# EAGLE board Extension (EAGLE 7.2.0)
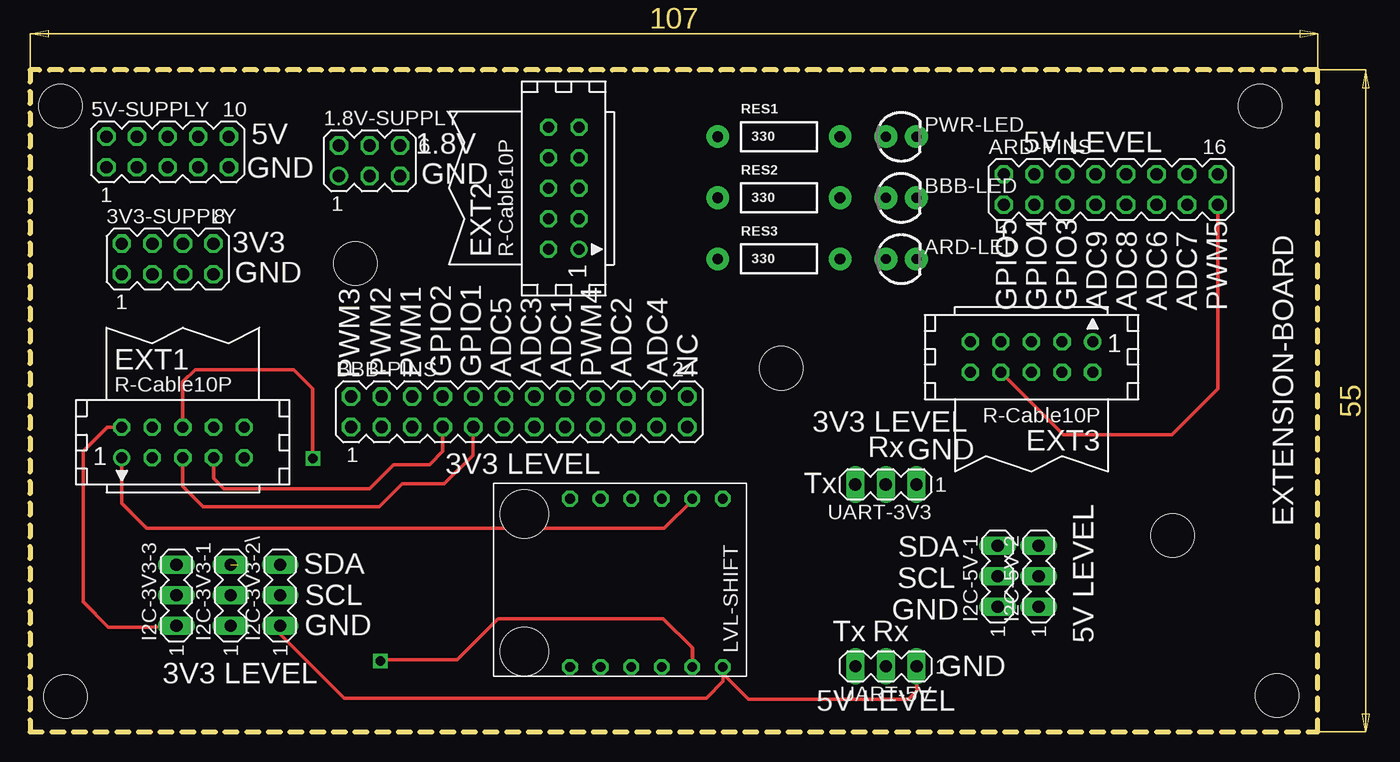
[diagram p0: board, top side]
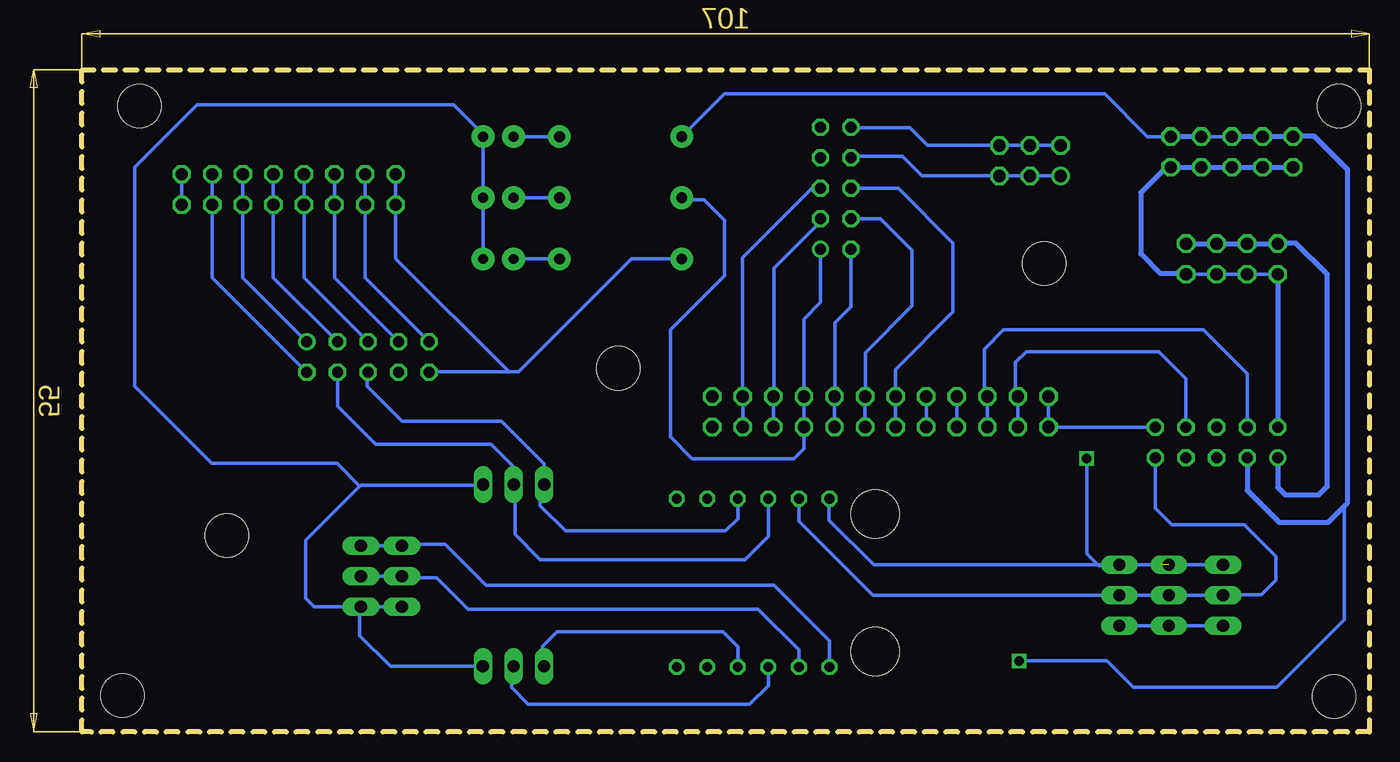
[diagram p1: board, bottom side, seen from below]

Size 107 x 55 mm. Coordinates in mm from the lower left corner, seen from the top.
Outline: 0,0 107,0 107,55 0,55 0,0
Copper layers (1*16): Top 0.035mm / dielectric 1.5mm / Bottom 0.035mm
Design rules "default": minimum track width 10mil, minimum drill 24mil, track to track 8mil, track to pad 8mil, pad to pad 8mil, via to via 8mil, smd to smd 8mil, copper to edge 40mil, drill to drill 8mil, minimum pad ring 10mil, minimum via ring 8mil, stop-mask expansion 4mil, vias tented up to drill 0mil, thermal gap 10mil
Holes 3.6 mm at 2.94,2.94 2.54,51.99 102.23,51.99 103.63,3.01 94.93,16.31 62.43,30.21 27.03,38.91

## Footprints (pad centres in the part's own frame; a part is rotated, then mirrored left to right if it is on the bottom)
MA03-2 = drill 1.016: 1 -2.54,-1.27 | drill 1.016 octagon: 2 -2.54,1.27; 3 0,-1.27; 4 0,1.27; 5 2.54,-1.27; 6 2.54,1.27
MA04-2 = drill 1.016 octagon: 1 -3.81,-1.27; 2 -3.81,1.27; 3 -1.27,-1.27; 4 -1.27,1.27; 5 1.27,-1.27; 6 1.27,1.27; 7 3.81,-1.27; 8 3.81,1.27
MA05-2 = drill 1.016 octagon: 1 -5.08,-1.27; 2 -5.08,1.27; 3 -2.54,-1.27; 4 -2.54,1.27; 5 0,-1.27; 6 0,1.27; 7 2.54,-1.27; 8 2.54,1.27; 9 5.08,-1.27; 10 5.08,1.27
LED3MM = drill 0.813 pad 1.88: A -1.27,0; K 1.27,0
MA08-2 = drill 1.016 octagon: 1 -8.89,-1.27; 2 -8.89,1.27; 3 -6.35,-1.27; 4 -6.35,1.27; 5 -3.81,-1.27; 6 -3.81,1.27; 7 -1.27,-1.27; 8 -1.27,1.27; 9 1.27,-1.27; 10 1.27,1.27; 11 3.81,-1.27; 12 3.81,1.27; 13 6.35,-1.27; 14 6.35,1.27; 15 8.89,-1.27; 16 8.89,1.27
MA12-2 = drill 1.016 octagon: 1 -13.97,-1.27; 2 -13.97,1.27; 3 -11.43,-1.27; 4 -11.43,1.27; 5 -8.89,-1.27; 6 -8.89,1.27; 7 -6.35,-1.27; 8 -6.35,1.27; 9 -3.81,-1.27; 10 -3.81,1.27; 11 -1.27,-1.27; 12 -1.27,1.27; 13 1.27,-1.27; 14 1.27,1.27; 15 3.81,-1.27; 16 3.81,1.27; 17 6.35,-1.27; 18 6.35,1.27; 19 8.89,-1.27; 20 8.89,1.27; 21 11.43,-1.27; 22 11.43,1.27; 23 13.97,-1.27; 24 13.97,1.27
CON10 = drill 0.914: 1 -5.08,-1.27 | drill 0.914 octagon: 2 -5.08,1.27; 3 -2.54,-1.27; 4 -2.54,1.27; 5 0,-1.27; 6 0,1.27; 7 2.54,-1.27; 8 2.54,1.27; 9 5.08,-1.27; 10 5.08,1.27
MA03-1 = drill 1.016 long: 1 -2.54,0; 2 0,0; 3 2.54,0
LEVEL-SHIFTER = drill 0.8 octagon: P$1 1.27,19.05; P$2 1.27,16.51; P$3 1.27,13.97; P$4 1.27,11.43; P$5 1.27,8.89; P$6 1.27,6.35; P$7 15.24,19.05; P$8 15.24,16.51; P$9 15.24,13.97; P$10 15.24,11.43; P$11 15.24,8.89; P$12 15.24,6.35 | hole 4: 13.97,2.54; 2.54,2.54
AXIAL-0.4 = drill 0.9 pad 1.88: P$1 -5.08,0; P$2 5.08,0

## Placement (x,y rotation side)
1.8V-SUPPLY  [MA03-2]  28.21,47.45 0 top
3V3-SUPPLY  [MA04-2]  11.43,39.29 0 top
5V-SUPPLY  [MA05-2]  11.43,48.18 0 top
ARD-LED  Blue  [LED3MM]  72.39,39.29 0 top
ARD-PINS  [MA08-2]  89.81,45.06 0 top
BBB-LED  White  [LED3MM]  72.39,44.37 0 top
BBB-PINS  [MA12-2]  40.64,26.59 0 top
EXT1  [CON10]  12.7,24.05 0 top
EXT2  [CON10]  44.35,45.16 90 top
EXT3  [CON10]  83.22,31.14 180 top
I2C-3V3-1  [MA03-1]  16.67,11.35 90 top
I2C-3V3-2\  [MA03-1]  20.78,11.35 90 top
I2C-3V3-3  [MA03-1]  12.16,11.35 90 top
I2C-5V-1  [MA03-1]  80.41,12.93 90 top
I2C-5V-2  [MA03-1]  83.82,12.93 90 top
LVL-SHIFT  [LEVEL-SHIFTER]  38.52,20.64 270 top
PWR-LED  Red  [LED3MM]  72.39,49.45 0 top
RES1  330  [AXIAL-0.4]  62.23,49.45 0 top
RES2  330  [AXIAL-0.4]  62.23,44.37 0 top
RES3  330  [AXIAL-0.4]  62.23,39.29 0 top
UART-3V3  [MA03-1]  71.11,20.56 180 top
UART-5V  [MA03-1]  71.13,5.45 180 top

## Library data of the parts
1.8V-SUPPLY 3V3-SUPPLY 5V-SUPPLY ARD-PINS BBB-PINS I2C-3V3-1 I2C-3V3-2\ I2C-3V3-3 I2C-5V-1 I2C-5V-2 UART-3V3 UART-5V = con-lstb
ARD-LED BBB-LED PWR-LED = SparkFun-LED
EXT1-EXT3 = con-harting
LVL-SHIFT = levelShifter
RES1-RES3 = SparkFun-Resistors

## Nets
S$1: EXT1.6 I2C-3V3-1.3 I2C-3V3-2\.3 I2C-3V3-3.3 LVL-SHIFT.P$6
S$2: EXT1.9 I2C-3V3-1.2 I2C-3V3-2\.2 I2C-3V3-3.2 LVL-SHIFT.P$5
S$3: LVL-SHIFT.P$9 UART-5V.3
S$4: EXT3.6 LVL-SHIFT.P$3 UART-3V3.3
S$5: EXT3.4 LVL-SHIFT.P$4 UART-3V3.2
S$6: I2C-5V-1.3 I2C-5V-2.3 LVL-SHIFT.P$12
S$7: I2C-5V-1.2 I2C-5V-2.2 LVL-SHIFT.P$11
S$8: LVL-SHIFT.P$10 UART-5V.2
S$10: 3V3-SUPPLY.2 3V3-SUPPLY.4 3V3-SUPPLY.6 3V3-SUPPLY.8 EXT1.1 LVL-SHIFT.P$2
S$11: 5V-SUPPLY.2 5V-SUPPLY.4 5V-SUPPLY.6 5V-SUPPLY.8 5V-SUPPLY.10 EXT1.3 LVL-SHIFT.P$8 RES1.P$1
S$12: 1.8V-SUPPLY.1 1.8V-SUPPLY.3 1.8V-SUPPLY.5 EXT2.8
S$13: BBB-PINS.1 BBB-PINS.2 EXT1.10
S$14: BBB-PINS.3 BBB-PINS.4 EXT1.8
S$15: BBB-PINS.5 BBB-PINS.6 EXT1.4
S$16: BBB-PINS.7 BBB-PINS.8 EXT1.7
S$17: BBB-PINS.9 BBB-PINS.10 EXT1.5
S$18: BBB-PINS.11 BBB-PINS.12 EXT2.6
S$19: BBB-PINS.13 BBB-PINS.14 EXT2.4
S$20: BBB-PINS.15 BBB-PINS.16 EXT2.2
S$21: BBB-PINS.17 BBB-PINS.18 EXT2.1 RES2.P$1
S$22: BBB-PINS.19 BBB-PINS.20 EXT2.3
S$23: BBB-PINS.21 BBB-PINS.22 EXT2.5
S$24: 1.8V-SUPPLY.2 1.8V-SUPPLY.4 1.8V-SUPPLY.6 EXT2.10
S$25: ARD-PINS.15 ARD-PINS.16 EXT3.8
S$26: ARD-PINS.13 ARD-PINS.14 EXT3.2
S$27: ARD-PINS.11 ARD-PINS.12 EXT3.1
S$28: ARD-PINS.9 ARD-PINS.10 EXT3.3
S$29: ARD-PINS.7 ARD-PINS.8 EXT3.5
S$30: ARD-PINS.5 ARD-PINS.6 EXT3.7
S$31: ARD-PINS.3 ARD-PINS.4 EXT3.9
S$32: ARD-PINS.1 ARD-PINS.2 EXT3.10 RES3.P$1
S$33: PWR-LED.A RES1.P$2
S$34: BBB-LED.A RES2.P$2
S$35: ARD-LED.A RES3.P$2
S$36: 3V3-SUPPLY.1 3V3-SUPPLY.3 3V3-SUPPLY.5 3V3-SUPPLY.7 5V-SUPPLY.1 5V-SUPPLY.3 5V-SUPPLY.5 5V-SUPPLY.7 5V-SUPPLY.9 ARD-LED.K BBB-LED.K EXT1.2 I2C-3V3-1.1 I2C-3V3-2\.1 I2C-3V3-3.1 I2C-5V-1.1 I2C-5V-2.1 LVL-SHIFT.P$7 PWR-LED.K UART-3V3.1 UART-5V.1

## Tracks (layer width: path | path; a pad name or v marks a point on that pad's centre or on a via)
S$1  (via drill 0.8 pad 0.41)  (1 unrouted)
  Top 0.305: EXT1.6 12.7,29.1 13.7,30.1 21.9,30.1 23.5,28.5 v23.5,22.7
  Bottom 0.305: v23.5,22.7 23.5,14.8 22.5,13.8 20.87,13.8 I2C-3V3-2\.3 | I2C-3V3-2\.3 17.99,13.89 17.8,13.7 17.5,13.7 17.3,13.9 I2C-3V3-3.3 | I2C-3V3-2\.3 41.19,13.89 44.9,17.6 44.9,19.34 LVL-SHIFT.P$6
S$2
  Bottom 0.305: EXT1.9 17.78,18.58 16.4,17.2 10.4,17.2 7.8,14.6 7.8,12.6 9,11.4 12.11,11.4 I2C-3V3-3.2 I2C-3V3-1.2 I2C-3V3-2\.2 41.25,11.35 47.4,17.5 LVL-SHIFT.P$5
S$3
  Bottom 0.305: LVL-SHIFT.P$9 52.49,7.09 53.7,8.3 67.5,8.3 68.7,7.1 68.7,5.56 UART-5V.3
S$4
  Bottom 0.305: LVL-SHIFT.P$3 52.49,17.71 53.5,16.7 66.8,16.7 68.9,18.8 68.9,20.23 UART-3V3.3 68.57,22.27 72.1,25.8 80.4,25.8 83.3,28.7 83.3,29.79 EXT3.6
S$5
  Bottom 0.305: LVL-SHIFT.P$4 49.95,16.25 51.9,14.3 68.9,14.3 71,16.4 71,20.45 UART-3V3.2 71.2,20.65 71.2,22.1 73,23.9 82.6,23.9 85.76,27.06 EXT3.4
S$6
  Bottom 0.305: I2C-5V-2.3 I2C-5V-1.3 80.28,15.6 76.8,15.6 73.4,12.2 49.5,12.2 44.87,7.57 LVL-SHIFT.P$12
S$7
  Bottom 0.305: I2C-5V-2.2 I2C-5V-1.2 80.28,12.8 77.5,12.8 74.9,10.2 50.8,10.2 47.41,6.81 LVL-SHIFT.P$11
S$8
  Bottom 0.305: LVL-SHIFT.P$10 49.95,3.85 51.5,2.3 69.9,2.3 71.3,3.7 71.3,5.28 UART-5V.2
S$10
  Top 0.305: LVL-SHIFT.P$2 55.03,19.23 52.7,16.9 9.7,16.9 7.6,19 7.6,22.76 EXT1.1
  Bottom 0.305: 7.58,40.6 3V3-SUPPLY.2
  Bottom 0.406: 3V3-SUPPLY.8 3V3-SUPPLY.6 3V3-SUPPLY.4 3V3-SUPPLY.2 | EXT1.1 7.62,20.32 7,19.7 4.2,19.7 3.5,20.4 3.5,38 6.1,40.6 7.58,40.6
S$11  (via drill 0.8 pad 0.41)
  Top 0.305: LVL-SHIFT.P$8 55.03,6.97 52.6,9.4 38.9,9.4 35.5,6 29.2,6 v29.1,5.9
  Bottom 0.305: 5V-SUPPLY.6 5V-SUPPLY.8 | 5V-SUPPLY.10 18.45,49.45 22,53 53.6,53 RES1.P$1 | v29.1,5.9 21.8,5.9 19.6,3.7 7.7,3.7 2.1,9.3 2.1,18.7 1.95,18.85
  Bottom 0.406: 5V-SUPPLY.2 5V-SUPPLY.4 5V-SUPPLY.6 | 5V-SUPPLY.8 5V-SUPPLY.10 | EXT1.3 10.16,20.06 7.5,17.4 3.4,17.4 1.95,18.85 1.8,19 1.8,46.7 4.6,49.5 6.3,49.5
  Bottom 0.61: 6.3,49.5 5V-SUPPLY.2
S$12
  Bottom 0.305: 1.8V-SUPPLY.1 1.8V-SUPPLY.3 1.8V-SUPPLY.5 37.18,46.18 38.8,47.8 42.98,47.8 EXT2.8
S$13
  Bottom 0.305: BBB-PINS.2 BBB-PINS.1 EXT1.10
S$14
  Bottom 0.305: BBB-PINS.3 BBB-PINS.4 29.4,28.05 29.4,30.7 28.5,31.6 17.5,31.6 15.24,29.34 EXT1.8
S$15
  Bottom 0.305: BBB-PINS.5 BBB-PINS.6 32,28.11 32,31.8 30.4,33.4 13.8,33.4 10.16,29.76 EXT1.4
S$16
  Top 0.305: EXT1.7 15.24,21.06 16.1,20.2 28.2,20.2 30.2,22.2 33.2,22.2 34.3,23.3 BBB-PINS.7
  Bottom 0.305: BBB-PINS.8 BBB-PINS.7
S$17
  Top 0.305: EXT1.5 12.7,20.4 14.4,18.7 29,18.7 30.9,20.6 34.4,20.6 36.8,23 36.8,25.29 BBB-PINS.9
  Bottom 0.305: BBB-PINS.10 BBB-PINS.9
S$18
  Bottom 0.305: BBB-PINS.11 39.5,25.45 39.5,25.9 39.37,26.03 BBB-PINS.12 39.4,27.89 39.4,30.1 34.6,34.9 34.6,40.6 39.16,45.16 EXT2.6
S$19
  Bottom 0.305: BBB-PINS.13 BBB-PINS.14 41.9,31.5 38,35.4 38,40 40.62,42.62 EXT2.4
S$20
  Bottom 0.305: BBB-PINS.15 BBB-PINS.16 44.4,27.91 44.4,34 43.08,35.32 EXT2.2
S$21
  Bottom 0.305: BBB-PINS.18 BBB-PINS.17 | BBB-PINS.18 46.99,23.51 47.8,22.7 56.3,22.7 58.1,24.5 58.1,33.4 53.6,37.9 53.6,42.5 55.3,44.2 56.98,44.2 RES2.P$1 | EXT2.1 45.62,35.68 47,34.3 BBB-PINS.18
S$22
  Bottom 0.305: BBB-PINS.19 BBB-PINS.20 49.5,27.89 49.5,38.5 45.62,42.38 EXT2.3
S$23
  Bottom 0.305: BBB-PINS.21 BBB-PINS.22 52.1,27.89 52.1,39.4 46.34,45.16 EXT2.5
S$24
  Bottom 0.305: 1.8V-SUPPLY.2 1.8V-SUPPLY.4 1.8V-SUPPLY.6 36.72,48.72 38.2,50.2 43.04,50.2 EXT2.10
S$25
  Top 0.305: EXT3.8 85.85,24.7 94.9,24.7 98.7,28.5 ARD-PINS.15
  Bottom 0.305: ARD-PINS.16 ARD-PINS.15
S$26
  Bottom 0.305: ARD-PINS.14 ARD-PINS.13 96.16,37.73 EXT3.2
S$27
  Bottom 0.305: ARD-PINS.12 ARD-PINS.11 93.62,37.73 EXT3.1
S$28
  Bottom 0.305: ARD-PINS.10 ARD-PINS.9 91.08,37.73 EXT3.3
S$29
  Bottom 0.305: ARD-PINS.8 ARD-PINS.7 88.54,37.73 EXT3.5
S$30
  Bottom 0.305: ARD-PINS.6 ARD-PINS.5 86,37.73 EXT3.7
S$31
  Bottom 0.305: ARD-PINS.4 ARD-PINS.3 83.46,37.73 EXT3.9
S$32
  Bottom 0.305: RES3.P$1 61.31,39.29 70.7,29.9 71.5,29.9 | 71.5,29.9 78.11,29.9 EXT3.10 | 71.5,29.9 80.92,39.32 ARD-PINS.1 ARD-PINS.2
S$33
  Bottom 0.305: RES1.P$2 PWR-LED.A
S$34
  Bottom 0.305: RES2.P$2 BBB-LED.A
S$35
  Bottom 0.305: RES3.P$2 ARD-LED.A
S$36
  Top 0.305: EXT1.2 7.6,25.3 6.4,25.3 4.4,23.3 4.4,10.8 6.5,8.7 10.05,8.7 I2C-3V3-3.1 | I2C-3V3-2\.1 20.78,8.12 26.1,2.8 56.2,2.8 57.6,4.2 57.6,5.37 LVL-SHIFT.P$7 57.57,4.83 59.7,2.7 73,2.7 73.7,3.4 73.7,5.42 UART-5V.1
  Bottom 0.305: PWR-LED.K BBB-LED.K ARD-LED.K 73.66,49.66 76.1,52.1 97.4,52.1 102.6,46.9 102.6,28.7 96.2,22.3 85.8,22.3 83.9,20.4 | 3V3-SUPPLY.1 3V3-SUPPLY.3 3V3-SUPPLY.5 3V3-SUPPLY.7 | I2C-3V3-2\.1 I2C-3V3-1.1 I2C-3V3-3.1 | UART-5V.1 81.35,5.45 83.9,8 83.9,10.31 I2C-5V-2.1 I2C-5V-1.1 87.69,10.39 88.4,11.1 88.4,15.9 83.9,20.4 | 83.9,20.4 83.8,20.5 73.71,20.5 UART-3V3.1
  Bottom 0.406: 5V-SUPPLY.1 5V-SUPPLY.3 5V-SUPPLY.5 5V-SUPPLY.7 5V-SUPPLY.9 16.89,46.91 19,44.8 19,39.7 17.4,38.1 15.32,38.1 3V3-SUPPLY.7 | 3V3-SUPPLY.1 EXT1.2

## Text on the board
tPlace: 5V LEVEL | 5V | GND | GND | 3V3 | GND | 3V3 LEVEL | Rx | GND | 3V3 LEVEL | Tx | EXTENSION-BOARD | SDA | SCL | SDA | SCL | GND | GND | Tx | Rx | 5V LEVEL | GND | 3V3 LEVEL | 5V LEVEL
tNames: 1.8V | GPIO5 | GPIO4 | GPIO3 | ADC9 | ADC8 | ADC6 | ADC7 | PWM5 | PWM3 | PWM2 | PWM1 | GPIO2 | GPIO1 | ADC5 | ADC3 | ADC1 | PWM4 | ADC2 | ADC4 | NC